# Altium PCB 8586S1.PcbDoc (part 2 of 2)
Units mm, origin at the board's own origin, x right, y up, seen from the top; angles counter-clockwise.
Board outline 80 x 108 mm, 2 copper layers (Top Layer, Bottom Layer); 127 components, 88 nets, 363 pads, 92 vias.
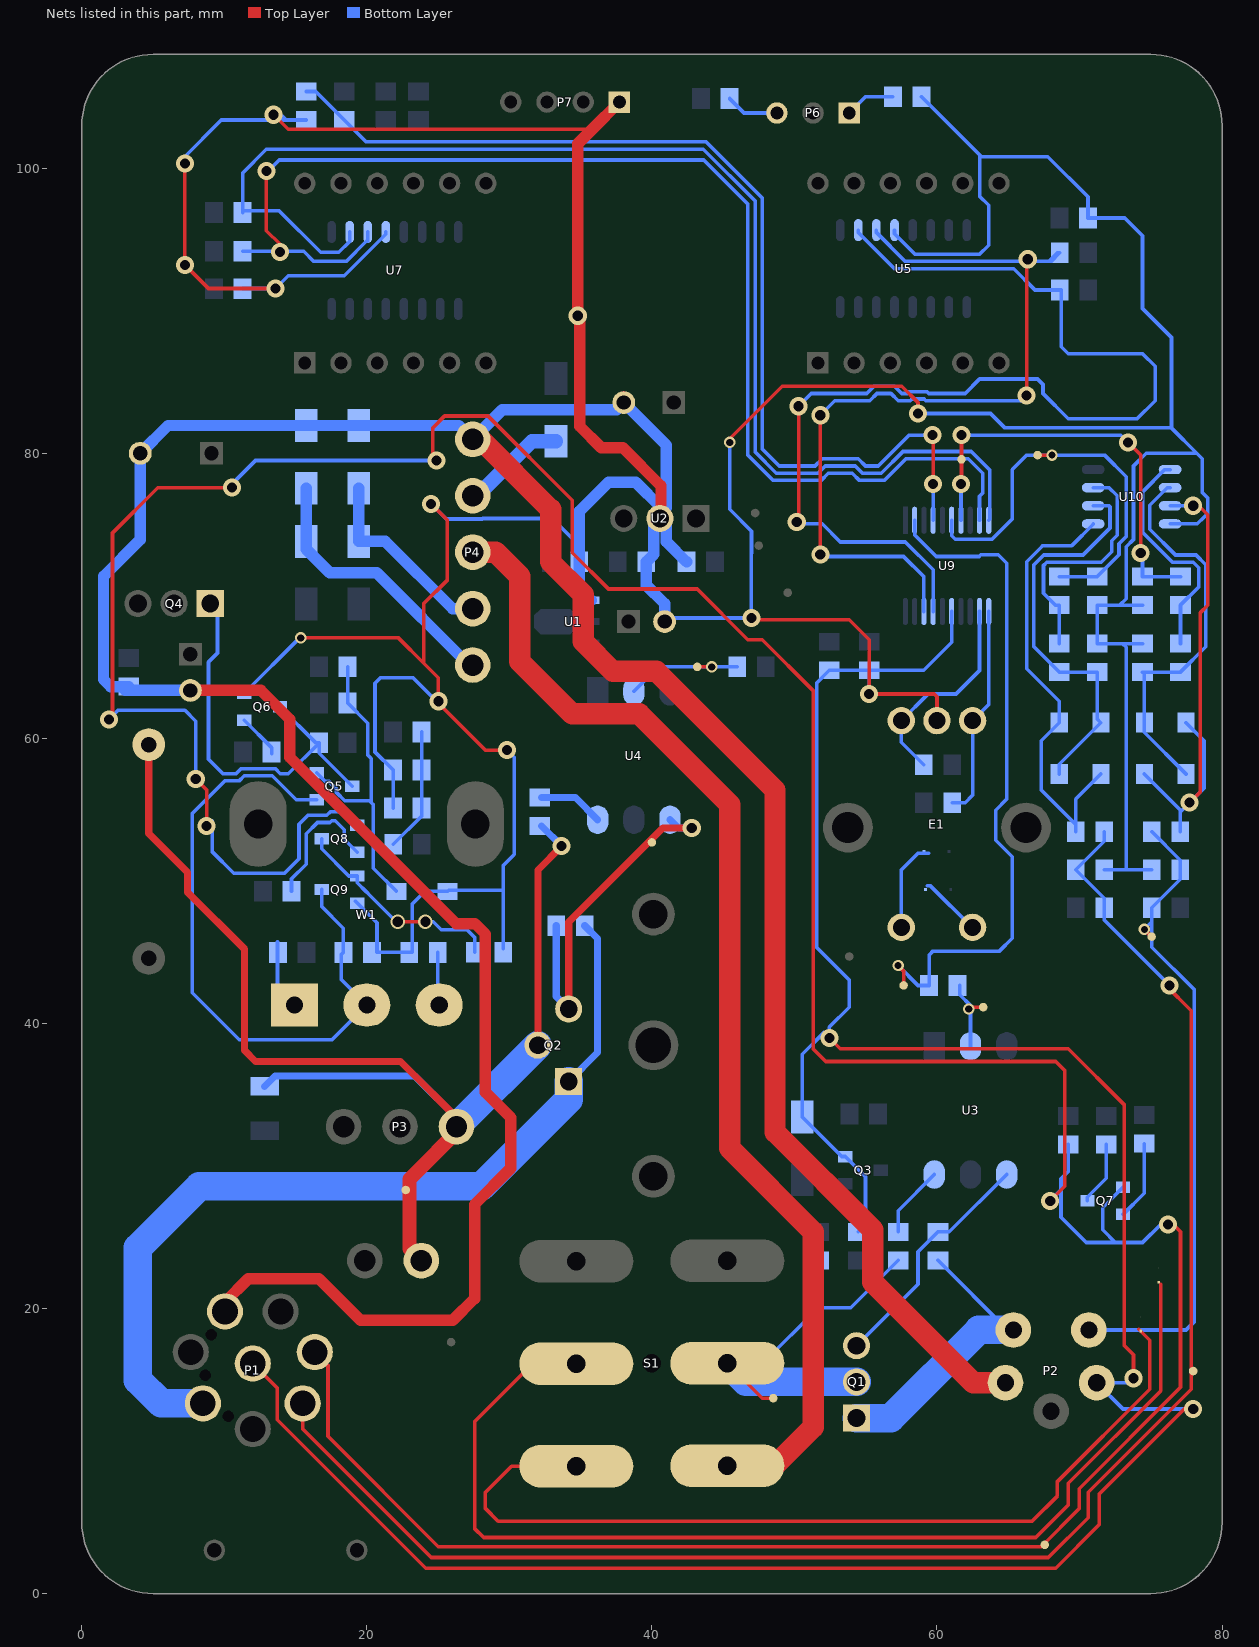
[diagram p2: the nets of this part, all layers, seen from the top]

## Via types
v1: diameter 1.27, hole 0.711, Top Layer to Bottom Layer, 81 vias
v2: diameter 0.8, hole 0.5, Top Layer to Bottom Layer, 9 vias
v3: diameter 1, hole 0.711, Top Layer to Bottom Layer, 2 vias

## Nets (pads, with @x,y where several pads share a name; then routed paths per layer and width w, separated by ;. In a path a pad name is that pad's centre, name@x,y a point inside that pad or via, vN(x,y) a via of type N, cw(c..) or ccw(c..) an arc to the next point about the centre after c; other vN are vias at no path point) (continued)
NetC16_2: C16.2 R15.2 R16.1 R20.1 | length 8.7
  Bottom Layer w0.254: R16.1@21.86,52.578 23.844,54.562 C16.2@23.844,55.118 R20.1@23.844,57.785 R15.2@23.844,60.452
NetC17_2: C17.2 Q5.1 Q9.3 W1.2 | length 47.3
  Bottom Layer w0.254: Q5.1@16.48,55.692 15.055,55.692 13.366,57.381 11.394,57.381 11.036,57.023 10.033,57.023 7.747,54.737 7.747,42.164 11.049,38.862 17.562,38.862 W1.2@20,41.3 18.212,43.088 18.212,44.84 C17.2@18.355,44.983 18.355,46.695 16.834,48.215 Q9.3@16.834,49.403
NetC22_2: C22.2 R41.2 U9.4 | length 72.4
  Top Layer w0.254: v1(59.69,81.28) 59.735,81.235 v1(59.735,77.851)
  Bottom Layer w0.254: C22.2@15.748,105.394 16.415,105.394 R41.2@18.415,103.394 19.955,101.854 43.815,101.854 47.752,97.917 47.752,80.308 48.939,79.121 51.442,79.121 51.95,79.629 54.476,79.629 54.984,79.121 55.88,79.121 58.039,81.28 v1(59.69,81.28) ; U9.4@59.735,75.311 v1(59.735,77.851)
NetD7_1: D7.1 D8.2 R25.2 U10.5 | length 31.5
  Bottom Layer w0.254: R25.2@69.739,53.467 R25.2@69.739,53.959 ; U10.5@70.96,75.057 70.96,75.024 69.469,73.533 67.437,73.533 67.284,73.38 67.276,73.38 66.294,72.398 66.294,64.897 68.58,62.611 D7.1@68.58,61.109 67.31,59.839 67.31,56.388 R25.2@69.739,53.959 ; D8.2@71.501,57.509 69.739,55.747 R25.2@69.739,53.959
NetD7_2: D7.2 D8.1 R27.2 R28.1 U10.6 | length 28.5
  Bottom Layer w0.254: D7.2@68.58,57.509 68.58,58.188 D8.1@71.501,61.109 71.247,61.363 R28.1@71.247,64.659 R27.2@68.58,64.659 66.802,66.437 66.802,72.187 67.487,72.872 70.248,72.872 72.141,74.765 72.141,76.26 72.074,76.327 U10.6@70.96,76.327
NetD9_1: D9.1 D10.2 R30.2 U10.3 | length 36.2
  Top Layer w0.254: v1(77.724,55.499) 78.486,56.261 78.486,68.834 78.994,69.342 78.994,75.692 78.359,76.327 v1(77.978,76.327)
  Bottom Layer w0.254: D10.2@74.549,57.509 77.073,54.985 77.073,54.848 ; U10.3@76.36,76.327 v1(77.978,76.327) ; R30.2@77.073,53.467 77.073,54.848 ; D9.1@77.47,61.109 78.74,59.839 78.74,56.515 v1(77.724,55.499) 77.073,54.848
NetD9_2: D9.2 D10.1 R32.2 R33.1 U10.2 | length 27.9
  Bottom Layer w0.254: U10.2@76.36,77.597 76.157,77.597 74.93,76.37 74.93,74.676 76.734,72.872 78.182,72.872 78.867,72.187 78.867,66.437 R32.2@77.089,64.659 R33.1@74.422,64.659 74.549,64.532 D10.1@74.549,61.109 74.549,60.43 D9.2@77.47,57.509
NetE1_4: E1.4 RZ4.2 | length 4.4
  Bottom Layer w0.254: 59.309,49.657 59.548,49.657 62.455,46.75 E1.4@62.5,46.75
NetE1_5: E1.5 RZ3.2 | length 6.4
  Bottom Layer w0.254: E1.5@57.5,46.75 57.5,50.769 58.674,51.943 59.436,51.943
NetP6_1: P6.1 R35.1 | length 3.5
  Bottom Layer w0.254: P6.1@53.848,103.886 54.991,105.029 R35.1@56.912,105.029
NetP6_3: P6.3 R34.1 | length 3.7
  Bottom Layer w0.254: R34.1@45.45,104.902 46.466,103.886 P6.3@48.768,103.886
NetQ1_3: Q1.3 R4.1 U3.4 | length 16.8
  Bottom Layer w0.254: Q1.3@54.356,17.399 58.674,21.717 58.674,23.987 R4.1@60.071,25.384 60.872,25.384 U3.4@64.897,29.409
NetQ2_3: Q2.3 R6.1 T5.1 U4.4 | length 25.4
  Top Layer w0.5: Q2.3@34.163,41.021 34.163,47.117 40.767,53.721 v1(42.799,53.721)
  Bottom Layer w0.5: R6.1@33.29,46.863 33.29,41.894 Q2.3@34.163,41.021 ; U4.4@41.275,54.301 41.855,53.721 v1(42.799,53.721)
NetQ4_1: Q4.1 Q5.3 Q6.3 R14.1 | length 28.6
  Bottom Layer w0.254: Q4.1@9.017,69.469 9.525,68.961 9.525,65.996 8.89,65.361 8.89,58.547 9.906,57.531 10.825,57.531 11.183,57.889 13.577,57.889 13.935,57.531 14.494,57.531 R14.1@16.653,59.69 ; Q6.3@13.9,62.23 16.44,59.69 R14.1@16.653,59.69 ; Q5.3@18.98,56.642 16.653,58.969 R14.1@16.653,59.69
NetQ5_2: Q5.2 R18.1 R21.1 Z1.1 | length 22
  Bottom Layer w0.254: Q5.2@16.48,57.592 17.091,56.981 17.348,56.981 17.869,56.46 17.869,56.203 18.446,55.626 20.193,55.626 20.32,55.499 ; R18.1@18.653,65.024 R21.1@18.653,62.484 20.066,61.071 20.066,58.845 20.32,58.591 20.32,55.499 ; Z1.1@22.076,49.276 20.447,50.905 20.447,55.372 20.32,55.499
NetQ6_1: Q6.1 R17.1 | length 3.1
  Bottom Layer w0.254: Q6.1@11.4,61.28 13.319,59.361 R17.1@13.319,58.928
NetQ7_2: Q7.2 R39.1 | length 5.6
  Bottom Layer w0.254: Q7.2@73.055,26.609 74.549,28.103 R39.1@74.549,31.578
NetQ7_3: Q7.3 R40.2 | length 4.5
  Bottom Layer w0.254: Q7.3@70.555,27.559 70.555,27.813 71.882,29.14 R40.2@71.882,31.512
NetQ8_2: Q8.2 R22.2 | length 9.7
  Bottom Layer w0.254: R22.2@14.716,49.276 14.716,50.149 15.748,51.181 15.748,53.312 16.538,54.102 17.406,54.102 17.533,54.229 17.78,54.229 18.415,53.594 18.415,52.928 Q8.2@19.334,52.009
NetQ8_3: Q8.3 Q9.1 R51.1 | length 15.3
  Top Layer w0.254: v3(22.174,47.142) v3(24.105,47.142)
  Bottom Layer w0.254: Q8.3@16.834,52.959 16.834,52.254 18.735,50.353 Q9.1@19.334,50.353 19.334,49.881 19.981,49.234 19.992,49.234 20.215,49.011 20.215,49 22.073,47.142 v3(22.174,47.142) ; v3(24.105,47.142) 24.663,47.142 25.222,46.584 27.026,46.584 27.575,46.034 R51.1@27.575,45.009
NetR2_1: R2.1 U3.6 | length 5.1
  Bottom Layer w0.254: R2.1@57.277,25.384 57.277,26.869 U3.6@59.817,29.409
NetR3_1: R3.1 U4.6 | length 4.6
  Bottom Layer w0.5: R3.1@32.258,55.864 34.632,55.864 U4.6@36.195,54.301
NetR5_1: R5.1 T7.1 U3.2 | length 6.3
  Top Layer w0.254: v2(62.23,41.021) 62.23,41.275 62.103,41.148 T7.1@63.373,41.148
  Bottom Layer w0.254: R5.1@61.595,42.672 61.595,42.021 62.357,41.259 U3.2@62.357,38.409
NetR7_1: R7.1 T6.1 U4.2 | length 9
  Top Layer w0.254: T6.1@43.18,65.024 v2(44.196,65.024)
  Bottom Layer w0.254: U4.2@38.735,63.301 40.458,65.024 v2(44.196,65.024) R7.1@45.99,65.024
NetR19_2: R19.2 W1.1 | length 4.9
  Bottom Layer w0.254: 13.732,45.72 13.732,42.488 W1.1@14.92,41.3
NetR23_1: R23.1 W1.3 | length 3.7
  Bottom Layer w0.254: R23.1@24.978,44.983 24.978,41.402 W1.3@25.08,41.3
NetR26_2: R26.2 R27.1 U10.7 | length 17.3
  Bottom Layer w0.254: R27.1@68.58,66.659 R26.2@68.58,69.358 68.31,69.358 67.474,70.194 67.474,72.141 67.697,72.364 71.535,72.364 72.263,73.092 72.263,73.867 72.649,74.253 72.649,77.022 72.074,77.597 U10.7@70.96,77.597
NetR31_2: R31.2 R32.1 U10.1 | length 16.2
  Bottom Layer w0.254: U10.1@76.36,78.867 75.99,78.867 74.422,77.299 74.422,74.466 76.524,72.364 77.972,72.364 78.359,71.977 78.359,70.628 R31.2@77.089,69.358 R32.1@77.089,66.659
NetRZ1_1: RZ1.1 S1.2 | length 77.4
  Top Layer w0.254: S1.2@34.699,16.137 31.631,16.137 27.559,12.065 27.559,4.572 28.194,3.937 66.929,3.937 69.215,6.223 69.215,7.747 75.692,14.224 75.692,21.717
NetRZ2_1: RZ2.1 S1.3 | length 64.2
  Top Layer w0.254: S1.3@34.699,8.947 30.156,8.947 28.321,7.112 28.321,5.969 29.21,5.08 66.675,5.08 68.453,6.858 68.453,7.874 74.93,14.351 74.93,17.78 74.168,18.542
ROTARY_A: E1.1 R36.1 U9.11 | length 15
  Bottom Layer w0.254: R36.1@61.071,55.499 61.976,55.499 62.5,56.023 E1.1@62.5,61.25 63.635,62.385 U9.11@63.635,68.911
ROTARY_B: E1.2 R37.1 U9.12 | length 14.8
  Bottom Layer w0.254: R37.1@59.071,58.166 57.5,59.737 E1.2@57.5,61.25 59.369,63.119 61.341,63.119 62.985,64.763 U9.12@62.985,68.911
SGND: C1.2 C2.2 C3.1 C4.2 C5.1 C6.1 C11.1 C12.1 C13.1 C14.2 C15.1 C16.1 C17.1 C18.1 C19.1 C20.1 C21.1 C22.1 C23.1 C24.1 D4.2 D5.2 D6.2 E1.3 P1.1 P1.8 P2.2 P2.4 P4.5 P7.1 Q3.2 Q6.2 Q9.2 R20.2 R23.2 R28.2 R33.2 R35.2 R51.2 U1.1 U2.2 U5.4 U7.4 U9.15 U10.4 Z1.2 | length 811.3
  Top Layer w0.254: v1(7.239,100.33) v1(7.239,93.218) 8.89,91.567 v1(13.589,91.567) ; P1.8@12,16.15 13.716,14.434 13.716,12.192 24.13,1.778 68.326,1.778 71.374,4.826 71.374,6.985 v1@77.66,13.271 ; v1(13.462,103.759) 14.478,102.743 35.814,102.743 ; v2(15.367,67.056) 22.225,67.056 24.003,65.278 ; v1@24.638,76.327 25.654,75.311 25.654,71.12 24.003,69.469 24.003,65.278 ; v1(29.845,59.182) 28.321,59.182 25.019,62.484 v1(25.019,62.611) 25.019,64.262 24.003,65.278 ; C2.2@38.029,83.566 C2.2@38.029,84.257 ; U2.2@40.64,75.819 U2.2@40.64,76.2 ; v2(45.466,80.772) 45.466,81.026 49.149,84.709 57.531,84.709 58.674,83.566 v1(58.674,82.804) ; v1(46.99,68.453) 46.863,68.326 53.848,68.326 55.245,66.929 v1(55.245,63.119) 59.817,63.119 60,62.936 E1.3@60,61.25 ; v1(52.451,38.989) 53.213,38.227 69.215,38.227 73.152,34.29 73.152,17.399 73.787,16.764 v1(73.787,15.113)
  Top Layer w0.8: C14.2@7.62,63.373 12.573,63.373 14.605,61.341 14.605,58.674 26.264,47.015 27.584,47.015 28.321,46.279 28.321,35.179 30.099,33.401 30.099,29.845 27.559,27.305 27.559,20.701 26.035,19.177 19.558,19.177 16.637,22.098 11.684,22.098 10.05,20.464 P1.1@10.05,19.8 ; P7.1@37.719,104.648 35.814,102.743 34.798,101.727 v1(34.798,89.662) 34.925,89.662 34.925,81.915 36.449,80.391 37.973,80.391 40.64,77.724 U2.2@40.64,76.2
  Top Layer w1.5: P4.5@27.432,80.991 27.975,80.991 32.893,76.073 32.893,72.39 35.179,70.104 35.179,66.802 37.274,64.706 40.322,64.706 48.641,56.388 48.641,32.385 55.499,25.527 55.499,21.844 62.543,14.8 P2.2@64.808,14.8
  Bottom Layer w0.254: v1(7.239,100.33) 7.112,100.33 7.112,100.711 9.795,103.394 14.335,103.394 ; C23.1@11.287,91.542 11.312,91.567 v1(13.589,91.567) 14.478,92.456 18.423,92.456 21.336,95.369 U7.4@21.336,95.537 ; Q6.2@11.4,63.18 15.276,67.056 v2(15.367,67.056) ; v1(13.462,103.759) 13.716,104.013 14.335,103.394 ; C22.1@15.748,103.394 14.335,103.394 ; Q9.2@19.207,48.58 Q9.2@19.334,48.453 20.71,47.077 20.71,45.009 23.19,45.009 23.19,48.387 24.079,49.276 Z1.2@25.676,49.276 25.752,49.352 29.575,49.352 ; C16.1@21.844,55.118 R20.2@21.844,57.785 20.574,59.055 20.574,63.881 20.955,64.262 23.241,64.262 v1@24.956,62.547 ; v1(24.511,76.454) 25.565,75.4 28.108,75.4 28.146,75.438 33.004,75.438 34.909,73.533 ; R51.2@29.575,45.263 29.575,49.352 ; v1(29.845,59.182) 30.353,58.674 30.353,51.867 29.575,51.089 29.575,49.352 ; C4.2@40.894,68.199 41.148,68.453 v1(46.99,68.453) 46.971,68.472 46.971,72.967 46.99,72.987 46.99,74.549 45.466,76.073 v2(45.466,80.772) ; v1@52.07,39.37 50.546,37.846 D6.2@50.546,33.442 53.32,30.668 Q3.2@53.564,30.668 54.991,29.241 54.991,25.892 C11.1@54.483,25.384 ; v1(52.451,38.989) 52.451,39.751 53.848,41.148 53.848,43.053 51.562,45.339 51.562,63.897 C12.1@52.451,64.786 C13.1@55.245,64.786 ; v1(55.245,63.119) C13.1@55.245,64.786 ; U5.4@57.023,95.664 57.023,95.421 58.464,93.98 62.992,93.98 63.627,94.615 63.627,97.409 62.992,98.044 62.992,100.949 ; v1(58.674,82.804) 63.754,82.804 64.77,81.788 76.454,81.788 ; R35.2@58.912,105.029 62.992,100.949 ; U9.15@61.035,68.911 61.035,66.75 59.071,64.786 C13.1@55.245,64.786 ; C18.1@71.739,50.8 73.279,50.8 ; v1(73.787,15.113) 73.474,14.8 P2.4@71.208,14.8 73.054,12.954 v1(77.978,12.954) ; R33.2@74.422,66.659 73.025,66.659 ; C21.1@74.422,69.358 72.834,69.358 ; C20.1@75.073,50.8 73.279,50.8 ; U10.4@76.36,75.057 78.272,75.057 78.696,75.482 78.994,75.779 78.994,76.875 78.613,77.256 78.613,79.629 78.232,80.01 ; 62.992,100.949 63.119,100.822 67.783,100.822 70.596,98.009 C24.1@70.596,96.52 73.177,96.52 74.422,95.275 74.422,90.17 76.454,88.138 76.454,81.788 ; 72.834,69.358 C19.1@71.247,69.358 R28.2@71.247,66.659 73.025,66.659 ; 72.834,69.358 73.279,69.802 73.279,73.446 73.787,73.954 73.787,79.121 74.676,80.01 78.232,80.01 ; 73.025,66.659 73.279,66.405 73.279,50.8 ; 76.454,81.788 78.232,80.01
  Bottom Layer w0.8: C15.1@3.064,63.373 C14.2@7.62,63.373 ; C15.1@3.302,63.643 2.016,63.643 1.524,64.135 1.524,71.374 4.104,73.954 C1.2@4.104,80.01 6.05,81.956 D5.2@15.748,81.956 D4.2@19.431,81.956 26.467,81.956 P4.5@27.432,80.991 29.499,83.058 37.521,83.058 C2.2@38.029,83.566 41.021,80.574 41.021,76.2 U2.2@40.64,75.819 ; U1.1@35.736,69.699 35.33,69.699 34.909,70.12 C6.1@34.909,72.39 34.909,73.533 34.909,75.93 36.957,77.978 38.862,77.978 40.64,76.2 U2.2@40.64,75.819 ; C4.2@40.894,68.199 40.894,69.469 39.608,70.755 C5.1@39.608,72.39 40.132,72.914 40.132,75.311 U2.2@40.64,75.819 ; C3.1@42.434,72.39 41.021,73.803 41.021,75.438 U2.2@40.64,75.819
SOLDER_ADC: C21.2 R31.1 T15.1 U9.7 | length 30.9
  Top Layer w0.254: v1(61.685,77.851) 61.722,77.888 v1(61.722,81.28) ; v1(73.406,80.772) 74.295,79.883 v1(74.295,73.025)
  Bottom Layer w0.254: U9.7@61.685,75.311 v1(61.685,77.851) v1@61.685,78.068 ; v1(61.722,81.28) 72.898,81.28 v1(73.406,80.772) ; v1(74.295,73.025) 74.549,73.025 74.422,72.898 C21.2@74.422,71.358 R31.1@77.089,71.358
SOLDER_SENSOR+: C20.2 P2.5 R29.2 R30.1 T18.1 | length 46.4
  Top Layer w0.254: v2(74.549,46.609) T18.1@75.057,46.101
  Bottom Layer w0.254: P2.5@70.658,18.5 77.47,18.5 78.063,19.093 78.063,42.373 75.073,45.363 75.073,47.133 ; v2(74.549,46.609) 75.073,47.133 ; R30.1@75.073,53.467 77.073,51.467 C20.2@77.073,50.8 77.073,50.133 R29.2@75.073,48.133 75.073,47.133
SOLDERHOT: R5.2 T11.1 U9.2 | length 48.3
  Top Layer w0.254: v2(57.277,44.069) 57.658,43.688 T11.1@57.658,42.672
  Bottom Layer w0.254: v2(57.277,44.069) 58.674,42.672 R5.2@59.452,42.672 59.452,44.815 59.722,45.085 64.389,45.085 65.278,45.974 65.278,51.708 64.119,52.867 64.119,54.975 64.897,55.753 64.897,72.303 64.302,72.898 63.079,72.898 62.952,72.771 59.944,72.771 58.435,74.28 U9.2@58.435,75.311
"THERMAL SENSOR+": C18.2 P1.5 R24.2 R25.1 T19.1 | length 117.5
  Top Layer w0.254: P1.5@15.5,13.35 15.5,11.551 24.511,2.54 67.818,2.54 70.612,5.334 70.612,7.112 77.851,14.351 77.851,40.894 76.073,42.672 v1(76.327,42.672)
  Bottom Layer w0.254: R25.1@71.739,53.467 71.739,52.8 C18.2@69.739,50.8 71.739,48.8 R24.2@71.739,48.133 71.739,47.26 v1(76.327,42.672)
THERMAL_ADC: C19.2 R26.1 T13.1 U9.6 | length 30.1
  Top Layer w0.254: T13.1@67.056,79.883 v2(68.072,79.883)
  Bottom Layer w0.254: U9.6@61.035,75.311 61.035,74.22 61.275,73.98 63.866,73.98 65.278,75.392 65.278,78.867 66.294,79.883 v2(68.072,79.883) 71.755,79.883 73.279,78.359 73.279,74.164 72.771,73.656 72.771,72.882 C19.2@71.247,71.358 R26.1@68.58,71.358
TM1650_CLK_1: R9.1 U7.2 U9.10 | length 90.5
  Bottom Layer w0.254: R9.1@11.287,96.901 R9.1@11.287,97.028 ; U7.2@18.796,95.537 18.796,94.869 18.034,94.107 16.764,94.107 13.843,97.028 R9.1@11.287,97.028 ; U9.10@63.635,75.311 63.717,75.393 63.717,78.817 62.397,80.137 57.614,80.137 56.09,78.613 54.773,78.613 54.265,79.121 52.161,79.121 51.653,78.613 48.728,78.613 47.244,80.097 47.244,97.707 43.605,101.346 12.954,101.346 11.287,99.679 R9.1@11.287,97.028
TM1650_CLK_2: R10.1 U5.2 U9.17 | length 80.3
  Top Layer w0.254: v1(50.165,75.184) 50.292,75.311 v1(50.292,83.312)
  Bottom Layer w0.254: v1(50.165,75.184) 50.038,75.057 51.943,75.057 53.213,73.787 57.785,73.787 59.735,71.837 U9.17@59.735,68.911 ; v1(50.292,83.312) 51.181,84.201 55.077,84.201 55.585,84.709 57.019,84.709 57.527,84.201 57.916,84.201 58.043,84.328 59.305,84.328 59.432,84.201 61.976,84.201 62.992,85.217 67.056,85.217 67.437,84.836 67.437,84.201 69.215,82.423 74.041,82.423 75.311,83.693 75.311,86.106 74.422,86.995 69.215,86.995 68.723,87.487 68.723,91.465 R10.1@68.621,91.465 66.878,91.465 65.38,92.964 57.015,92.964 54.483,95.496 U5.2@54.483,95.664
TM1650_DIO_1: R11.1 U7.3 U9.9 | length 91.9
  Top Layer w0.254: v1(12.954,99.822) 12.954,95.631 13.919,94.666 v1(13.919,94.132)
  Bottom Layer w0.254: R11.1@11.287,94.183 v1@13.716,94.183 ; v1(12.954,99.822) 12.954,99.695 13.848,100.589 43.643,100.589 46.736,97.496 46.736,79.887 48.518,78.105 51.863,78.105 52.371,78.613 54.055,78.613 54.563,78.105 56.301,78.105 57.825,79.629 62.186,79.629 63.209,78.606 63.209,77.22 62.985,76.996 U9.9@62.985,75.311 ; v1(13.919,94.132) 13.767,94.132 v1@13.716,94.183 ; U7.3@20.066,95.537 20.066,94.889 19.97,94.889 18.553,93.472 16.281,93.472 15.57,94.183 v1@13.716,94.183
TM1650_DIO_2: R8.1 U5.3 U9.18 | length 60.8
  Top Layer w0.254: v1(51.816,72.898) v1(51.816,82.677) ; v1(66.294,84.074) v1@66.294,93.624 ; v1(66.37,93.624) v1@66.37,94.031
  Bottom Layer w0.254: v1(51.816,72.898) 51.943,72.771 57.658,72.771 59.085,71.344 U9.18@59.085,68.911 ; v1(51.816,82.677) 52.832,83.693 55.288,83.693 55.796,84.201 56.769,84.201 57.277,83.693 58.126,83.693 58.253,83.82 59.095,83.82 59.222,83.693 65.913,83.693 v1(66.294,84.074) ; U5.3@55.753,95.664 55.753,95.496 57.777,93.472 67.834,93.472 ; 67.834,93.472 68.012,93.472 R8.1@68.621,94.082 68.444,94.082 67.834,93.472
~220V: CX1.2 P3.1 P5.1 Q2.2 R1.2 R3.2 T4.1 | length 93.7
  Top Layer w0.5: CX1.2@4.699,59.824 4.699,53.34 7.429,50.61 7.429,49.213 11.43,45.212 11.43,38.1 12.192,37.338 22.352,37.338 P3.1@26.797,32.893 ; Q2.2@32,38.481 32,50.78 v1(33.671,52.451)
  Top Layer w1: P5.1@23.824,23.368 22.987,24.205 22.987,29.083 P3.1@26.797,32.893
  Bottom Layer w0.5: R1.2@12.827,35.586 13.563,36.322 23.368,36.322 26.605,33.086 P3.1@26.607,33.084 ; R3.2@32.258,53.864 v1(33.671,52.451)
  Bottom Layer w2: P3.1@26.289,32.766 26.289,32.77 26.605,33.086 Q2.2@32,38.481
~+12V: D3.2 P4.4 | length 7.4
  Bottom Layer w1: P4.4@27.432,77.031 27.755,77.031 31.582,80.858 D3.2@33.274,80.858
~+26V: D1.2 D4.1 P4.2 | length 13.7
  Bottom Layer w0.8: D4.1@19.431,77.556 D1.2@19.431,73.828 21.295,73.828 26.012,69.111 P4.2@27.432,69.111
~+28V: P4.3 S1.6 | length 82.1
  Top Layer w1.5: P4.3@27.432,73.071 29.037,73.071 30.734,71.374 30.734,65.405 34.417,61.722 39.116,61.722 45.466,55.372 45.466,31.242 51.308,25.4 51.308,11.684 48.597,8.973 S1.6@45.299,8.973
~+28V-S: Q1.2 R2.2 R13.2 S1.5 T8.1 | length 32.1
  Top Layer w0.254: S1.5@45.299,16.163 47.746,13.716 T8.1@48.514,13.716
  Bottom Layer w0.254: S1.5@45.299,16.163 47.786,16.163 51.689,20.066 ; R13.2@51.689,23.384 51.689,20.066 ; R2.2@57.277,23.384 53.959,20.066 51.689,20.066
  Bottom Layer w2: S1.5@45.299,16.163 46.603,14.859 Q1.2@54.356,14.859
~-26V: D2.2 D5.1 P4.1 | length 19.3
  Bottom Layer w0.8: D5.1@15.748,77.556 D2.2@15.748,73.828 15.748,73.279 17.399,71.628 20.701,71.628 27.178,65.151 P4.1@27.432,65.151
发热丝: P1.3 Q2.1 R6.2 | length 62.5
  Bottom Layer w0.5: Q2.1@34.163,35.941 36.195,37.973 36.195,45.958 R6.2@35.29,46.863
  Bottom Layer w2: P1.3@8.5,13.35 5.573,13.35 3.937,14.986 3.937,24.257 8.255,28.575 28.067,28.575 34.163,34.671 Q2.1@34.163,35.941
干簧管感应: P1.6 Q7.1 Q8.1 R38.1 T9.1 | length 268.9
  Top Layer w0.254: v1(1.905,61.341) 2.159,61.595 2.159,74.422 5.334,77.597 v1(10.541,77.597) ; v1(8.001,57.15) 8.763,56.388 v1(8.763,53.848) ; P1.6@16.35,16.95 17.272,16.028 17.272,11.049 25.019,3.302 67.31,3.302 69.977,5.969 69.977,7.366 77.089,14.478 77.089,25.4 v1@76.327,26.162 ; v1(24.892,79.502) 24.638,79.756 24.638,81.805 25.455,82.622 28.503,82.622 34.417,76.708 34.417,73.025 36.957,70.485 43.18,70.485 46.736,66.929 47.752,66.929 51.308,63.373 51.308,38.227 52.197,37.338 68.326,37.338 68.961,36.703 68.961,28.575 v1(67.945,27.559)
  Bottom Layer w0.254: v1(1.905,61.341) 2.54,61.976 7.239,61.976 8.001,61.214 v1(8.001,57.15) ; v1(8.763,53.848) 9.144,54.229 9.144,52.07 10.668,50.546 14.224,50.546 15.24,51.562 15.24,53.975 15.875,54.61 17.196,54.61 17.45,54.864 18.379,54.864 Q8.1@19.334,53.909 ; v1(10.541,77.597) 10.541,77.851 12.192,79.502 v1(24.892,79.502) ; v1(67.945,27.559) 68.707,28.321 ; R38.1@69.215,31.512 69.215,29.617 68.707,29.109 68.707,28.321 ; Q7.1@73.055,28.509 71.628,27.082 71.628,25.527 72.517,24.638 ; v1(76.2,25.908) 75.692,25.908 74.422,24.638 72.517,24.638 ; 68.707,28.321 68.707,26.416 70.485,24.638 72.517,24.638
烙铁发热丝IN: P2.1 Q1.1 R4.2 | length 20.5
  Bottom Layer w0.254: R4.2@60.071,23.384 64.955,18.5 P2.1@65.358,18.5
  Bottom Layer w2: Q1.1@54.356,12.319 56.769,12.319 62.95,18.5 P2.1@64.955,18.5
pads on no net: E1. P3.2 S1. S1.1 S1.4 SR1. U3.3 U3.5 U4.3 U4.5 U5.7 U6.6 U7.7 U8.6 W1.

## Polygon pours and split planes (outlines as drawn)
no net on Bottom Layer "Bottom Layer-No Net" (solid, pour order 0): 11.176,17.526 9.144,17.526 8.128,18.542 8.128,21.209 10.287,23.368 13.081,23.368 13.589,22.86 13.589,20.701 13.589,18.796 12.573,17.78 12.319,17.526 11.049,17.526

## Keep-outs
Keep-Out Layer:
  circle w1: c75,103.999 r1.6
  circle w1: c75,39 r1.6
  circle w1: c75,5 r1.6
  circle w1: c5,103.999 r1.6
  circle w1: c5,39 r1.6
  circle w1: c5,5 r1.6
  lines w1: 0,5 ccw(c5,5) 5,0 75,0 ccw(c75,5) 80,5 80,103 ccw(c75,103) 75,108 5,108 ccw(c5,103) 0,103 0,5

## Other copper
Top Layer:
  pour cut-out: 41.275,77.851 40.64,77.216 39.116,77.216 39.116,75.819 38.989,75.692 39.751,74.93 39.751,74.295 40.005,74.041 41.783,74.041 41.783,74.295 42.037,74.549 42.037,77.216 41.529,77.724
  pour cut-out: 37.719,81.915 36.576,83.058 36.576,84.582 36.957,84.963 39.116,84.963 40.005,84.074 40.005,82.55 38.989,81.534 38.862,81.661 37.338,81.661 37.338,82.042 37.084,82.296
  pour cut-out: 26.035,78.994 27.559,78.994 31.242,75.311 31.242,70.739 33.401,68.58 33.401,65.532 36.068,62.865 40.005,62.865 46.99,55.88 46.99,31.242 54.102,24.13 54.102,21.082 54.229,21.082 62.992,12.319 65.405,12.319 66.929,13.843 66.929,15.621 65.786,16.764 62.865,16.764 57.404,22.225 57.404,26.416 50.546,33.274 50.546,57.531 41.656,66.421 37.846,66.421 36.322,67.945 36.322,71.247 34.036,73.533 34.036,77.089 28.503,82.622 26.615,82.622 25.654,81.661 26.162,81.153 26.162,79.121
  pour cut-out: 25.527,81.661 26.67,82.804 28.829,82.804 29.591,82.042 29.591,80.137 28.575,79.121 26.162,79.121 25.527,79.756 25.527,81.534 25.654,81.661
  pour cut-out: 2.032,80.391 3.175,81.534 5.334,81.534 6.096,80.772 6.096,78.867 5.08,77.851 2.667,77.851 2.032,78.486 2.032,80.264 2.159,80.391
  pour cut-out: 1.651,62.23 11.85,62.23 13.589,60.491 13.589,57.531 27.305,43.815 27.305,34.036 28.448,32.893 28.448,30.099 26.543,28.194 26.543,21.209 25.781,20.447 20.066,20.447 17.145,23.368 10.287,23.368 8.128,21.209 8.128,18.542 9.144,17.526 11.176,17.526 12.065,18.415 27.305,18.415 28.702,19.812 28.702,26.797 31.369,29.464 31.369,35.052 29.845,36.576 29.845,46.482 16.129,60.198 16.129,61.849 12.827,65.151 2.413,65.151 1.651,64.389
  pour cut-out: 1.905,5.461 1.905,59.944 3.683,61.722 6.096,61.722 7.239,60.579 7.239,52.959 12.827,47.371 12.827,38.862 12.954,38.862 13.716,38.1 26.543,38.1 31.242,42.799 31.242,57.404 31.877,58.039 43.815,58.039 46.101,55.753 45.974,55.626 45.974,27.051 45.466,26.543 32.258,26.543 30.226,24.511 30.226,16.129 24.511,10.414 24.511,0.635 3.175,0.635 1.905,1.905
Bottom Layer:
  pour cut-out: 27.94,79.121 30.48,81.661 38.227,81.661 40.005,79.883 40.005,76.327 41.275,75.057 42.418,76.2 42.418,81.026 38.608,84.836 29.21,84.836 25.654,81.28 25.654,79.629 26.289,78.994 26.416,79.121
  pour cut-out: 7.239,61.595 9.017,61.595 9.906,62.484 9.906,63.881 9.017,64.77 3.429,64.77 2.54,65.659 2.54,70.739 5.334,73.533 5.334,78.867 6.858,80.391 25.4,80.391 26.543,79.248 28.448,79.248 29.718,80.518 29.464,80.772 29.464,82.042 28.956,82.042 26.924,84.074 26.67,83.82 6.35,83.82 1.651,79.121 1.651,73.533 0.254,72.136 0.254,63.373 2.159,61.468 7.366,61.468
  pour cut-out: 67.183,15.748 67.183,13.97 65.405,12.192 63.373,12.192 62.103,13.462 62.23,13.589 62.23,15.748 63.246,16.764 66.167,16.764
  pour cut-out: 5.969,64.643 8.636,64.643 9.525,63.754 9.525,61.849 8.89,61.214 6.731,61.214 5.842,62.103 5.842,64.516
  pour cut-out: 1.778,5.334 1.778,59.817 3.556,61.595 5.969,61.595 7.112,60.452 7.112,52.832 12.7,47.244 12.7,38.735 12.827,38.735 13.589,37.973 26.416,37.973 31.115,42.672 31.115,57.277 31.75,57.912 43.688,57.912 45.974,55.626 45.847,55.499 45.847,26.924 45.339,26.416 32.131,26.416 30.099,24.384 30.099,16.002 24.384,10.287 24.384,0.508 3.048,0.508 1.778,1.778

## Silkscreen, mask and mechanical layers (free items; w line width, h text height)
Top Overlay:
  text "0" at 29.972,80.518 h1
  text "12" at 29.464,76.454 h1
  text "28" at 29.591,72.517 h1
  text "Air" at 34.29,28.194 h1
  text "Solder" at 43.18,28.194 h1
  text "8586S  REV1.0" at 33.147,2.032 h1
Bottom Overlay:
  lines w0.2: 24.819,54.991 24.892,54.991 25.654,55.753 ; 24.819,57.531 24.819,57.712 25.654,58.547 ; 24.819,60.071 24.819,60.125 25.146,60.452 ; 24.835,52.451 24.835,52.521 25.654,53.34 25.654,62.357 ; 25.019,60.325 25.654,60.96 ; 40.386,71.365 40.649,71.365 41.656,70.358 44.831,70.358 ; 59.944,62.357 63.119,62.357 63.627,61.849 63.754,61.722 66.675,61.722 68.072,63.119 74.041,63.119 74.549,63.627 ; 60.452,67.691 62.865,67.691 66.167,67.691 66.548,68.072 66.548,72.644 67.183,73.279 73.279,73.279 74.196,72.362 ; 67.945,73.279 67.945,73.222 68.834,72.333 ; 68.199,37.465 68.199,53.34 68.707,53.848 ; 68.199,47.822 68.199,47.752 68.764,48.317 68.764,48.387 ; 68.199,50.546 68.707,51.054 ; 68.326,63.119 68.834,63.627 ; 70.485,73.279 70.739,73.279 71.247,72.771 71.628,72.39 ; 70.739,63.119 71.247,63.627 ; 71.755,37.338 71.755,45.085 73.66,46.99 73.66,53.213 74.041,53.594 ; 73.66,47.879 73.66,48.006 74.041,48.387 ; 73.66,50.673 73.717,50.673 74.098,51.054
  text "L" at 26.289,37.211 h1
  text "N" at 17.907,36.957 h1
Top Solder:
  lines w1.5: 27.197,73.05 29.083,73.05 30.734,71.399 30.734,65.405 34.417,61.722 39.116,61.722 45.466,55.372 45.466,31.242 51.308,25.4 51.308,11.684 48.597,8.973 45.299,8.973 ; 27.432,80.991 28,80.991 32.868,76.124 32.868,72.39 35.179,70.079 35.179,66.802 37.262,64.719 40.31,64.719 48.666,56.363 48.666,32.36 55.499,25.527 55.499,21.869 62.568,14.8 64.808,14.8
  lines w2: 7.772,16.612 6.375,18.009 6.375,26.67 12.471,32.766 18.369,32.766
Bottom Solder:
  lines w1.5: 45.669,16.078 46.888,14.859 54.356,14.859 ; 54.356,12.319 56.769,12.319 62.95,18.5 65.358,18.5
  lines w2: 8.5,13.35 5.548,13.35 3.912,14.986 3.912,24.257 8.23,28.575 28.143,28.575 34.163,34.595 34.163,35.941 ; 26.289,32.766 32,38.477 32,38.481

## Text inside footprints (layer, text, board x,y; h text height)
Q3: Mechanical 1 "U1" at 55.224,30.132 h0.6 r90
Q5: Mechanical 1 "U1" at 18.14,57.056 h0.6 r90
Q6: Mechanical 1 "U1" at 13.06,62.644 h0.6 r90
Q7: Mechanical 1 "U1" at 71.395,27.145 h0.6 r270
Q8: Mechanical 1 "U1" at 17.674,52.545 h0.6 r270
Q9: Mechanical 1 "U1" at 17.674,48.989 h0.6 r270
U5: Mechanical 15 "1" at 57.822,92.514 h0.75
U7: Mechanical 15 "1" at 22.135,92.387 h0.75
U10: Mechanical 15 "1" at 73.21,76.798 h0.75 r270